# EAGLE board Ardy-Pro-Outline (EAGLE 6.4)
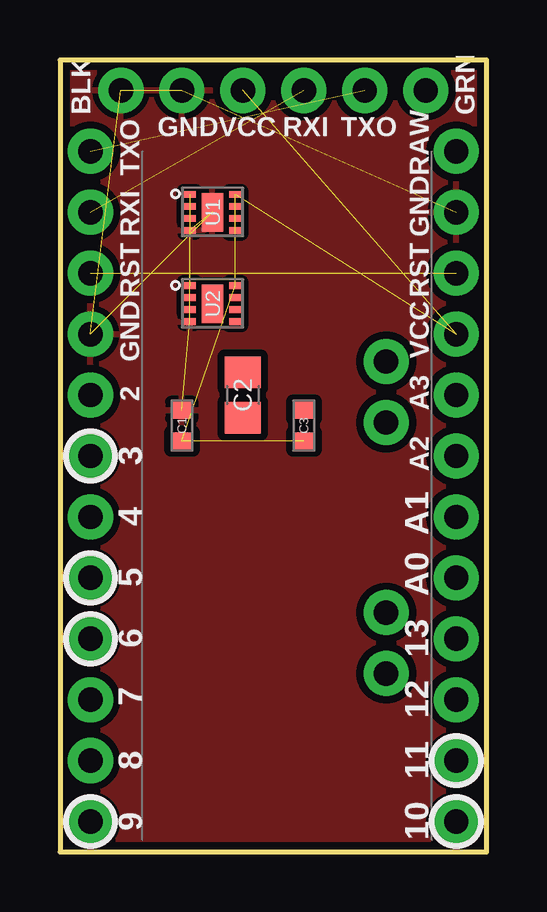
[diagram p0: board, top side]
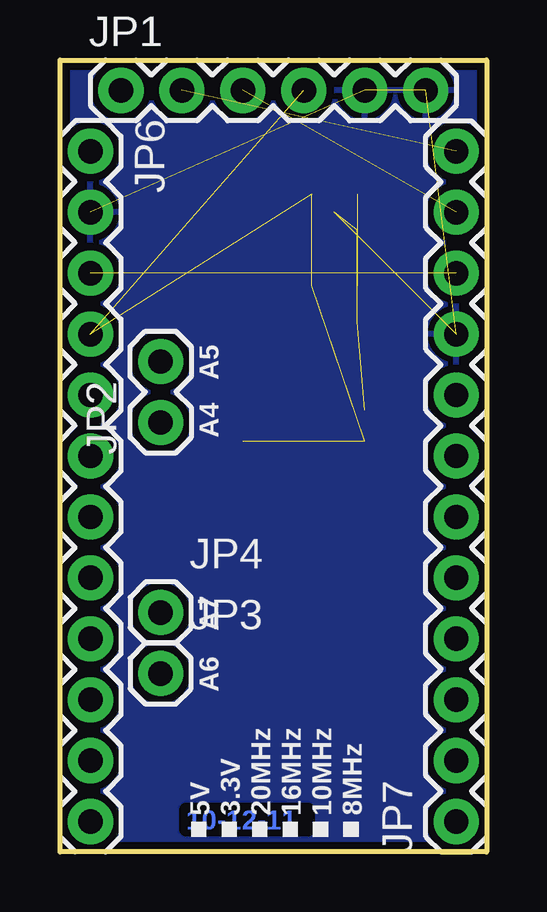
[diagram p1: board, bottom side, seen from below]

Size 17.78 x 33.02 mm. Coordinates in mm from the lower left corner, seen from the top.
Outline: 0,33.02 0,0 17.78,0 17.78,33.02 0,33.02
Copper layers (1*16): Top 0.035mm / dielectric 1.5mm / Bottom 0.035mm
Design rules "default": minimum track width 8mil, minimum drill 20mil, track to track 8mil, track to pad 8mil, pad to pad 8mil, via to via 8mil, smd to smd 8mil, copper to edge 8mil, drill to drill 8mil, minimum pad ring 12mil, minimum via ring 10mil, stop-mask expansion 4mil, vias tented up to drill 20mil, thermal gap 10mil
Net classes: 0 default: width 0.203 mm; 1 vcc: width 0.254 mm

## Footprints (pad centres in the part's own frame; a part is rotated, then mirrored left to right if it is on the bottom)
C0402 = smd 0.7 x 0.9: 1 -0.65,0; 2 0.65,0
C0805 = smd 1.3 x 1.5: 1 -0.95,0; 2 0.95,0
1X06 = drill 1.016 pad 1.88: 1 0,0; 2 2.54,0; 3 5.08,0; 4 7.62,0; 5 10.16,0; 6 12.7,0
1X02 = drill 1.016 pad 1.88: 1 0,0; 2 2.54,0
1X01 = drill 1.016 pad 1.88: 1 0,0
1X12 = drill 1.016 pad 1.88: 1 0,0; 2 2.54,0; 3 5.08,0; 4 7.62,0; 5 10.16,0; 6 12.7,0; 7 15.24,0; 8 17.78,0; 9 20.32,0; 10 22.86,0; 11 25.4,0; 12 27.94,0
WSON-8 = smd 0.28 x 0.5: 1 -0.75,-0.95; 2 -0.25,-0.95; 3 0.25,-0.95; 4 0.75,-0.95; 5 0.75,0.95; 6 0.25,0.95; 7 -0.25,0.95; 8 -0.75,0.95 | smd 1.6 x 0.9: 9 0,0

## Placement (x,y rotation side)
C1  0.1uF  [C0402]  5.08,17.78 90 top
C2  10uF  [C0805]  7.62,19.05 90 top
C3  0.1uF  [C0402]  10.16,17.78 90 top
JP1  FTDI Basic  [1X06]  15.24,31.75 0 bottom
JP2  [1X02]  13.59,17.91 90 bottom
JP3  [1X01]  13.59,7.44 0 bottom
JP4  [1X01]  13.59,9.98 0 bottom
JP6  [1X12]  16.51,29.21 270 bottom
JP7  [1X12]  1.27,1.27 90 bottom
U1  DRV8837  [WSON-8]  6.35,26.67 270 top
U2  DRV8837  [WSON-8]  6.35,22.86 270 top

## Library data of the parts
C1 C3 = tinycircuits; PARTNO: AS-ITM-00008
C2 = tinycircuits; PARTNO: AS-ITM-00045
JP1-JP4 JP6 JP7 = SparkFun
U1 U2 = tinycircuits; PARTNO: AS-ITM-00042

## Nets
#SLEEP1: U1.7
#SLEEP2: U2.7
A0: JP6.8
A1: JP6.7
A2: JP6.6
A3: JP6.5
A4: JP2.1
A5: JP2.2
A6: JP3.1
A7: JP4.1
D2: JP7.8
D3: JP7.7
D4: JP7.6
D5: JP7.5
D6: JP7.4
D7: JP7.3
D8: JP7.2
D9: JP7.1
D10: JP6.12
DTR: JP1.1
GND [vcc]: C1.2 JP1.5 JP1.6 JP6.2 JP7.9 U1.4 U1.9 U2.4
GND1 [vcc]: C3.2
MISO: JP6.10
MOSI: JP6.11
MOTOR1_DIR: U1.5
MOTOR1_OUTA: U1.2
MOTOR1_OUTB: U1.3
MOTOR1_PWM: U1.6
MOTOR2_DIR: U2.5
MOTOR2_OUTA: U2.2
MOTOR2_OUTB: U2.3
MOTOR2_PWM: U2.6
N$5: U2.9
RAW [vcc]: JP6.1
RESET: JP6.3 JP7.10
RXI: JP1.3 JP7.11
SCK: JP6.9
TXO: JP1.2 JP7.12
VCC: C1.1 C3.1 JP1.4 JP6.4 U1.8 U2.8
VM: U1.1 U2.1

## Tracks (layer width: path | path; a pad name or v marks a point on that pad's centre or on a via)
GND  (7 unrouted)
  pour Top (isolate 0.305): 0,33.02 17.78,33.02 17.78,0 0,0
  pour Bottom (isolate 0.305): 0,33.02 17.78,33.02 17.78,0 0,0
RESET  (1 unrouted)
RXI  (1 unrouted)
TXO  (1 unrouted)
VCC  (5 unrouted)
VM  (1 unrouted)

## Text on the board
Bottom: 10-12-11
tPlace: BLK | GRN | GND | VCC | RXI | TXO | TXO | RAW | RXI | GND | RST | RST | VCC | GND | 2 | A3 | 3 | A2 | 4 | A1 | 5 | A0 | 6 | 13 | 7 | 12 | 8 | 11 | 9 | 10
bPlace: A5 | A4 | A7 | A6 | 8MHz | 10MHz | 16MHz | 20MHz | 3.3V | 5V